# Altium PCB trap sensor LD PCB.PcbDoc
Units mil, origin at the board's own origin, x right, y up, seen from the top; angles counter-clockwise.
Board outline 3340 x 2720 mil, 2 copper layers (Top Layer, Bottom Layer); 19 components, 18 nets, 83 pads, 4 vias.
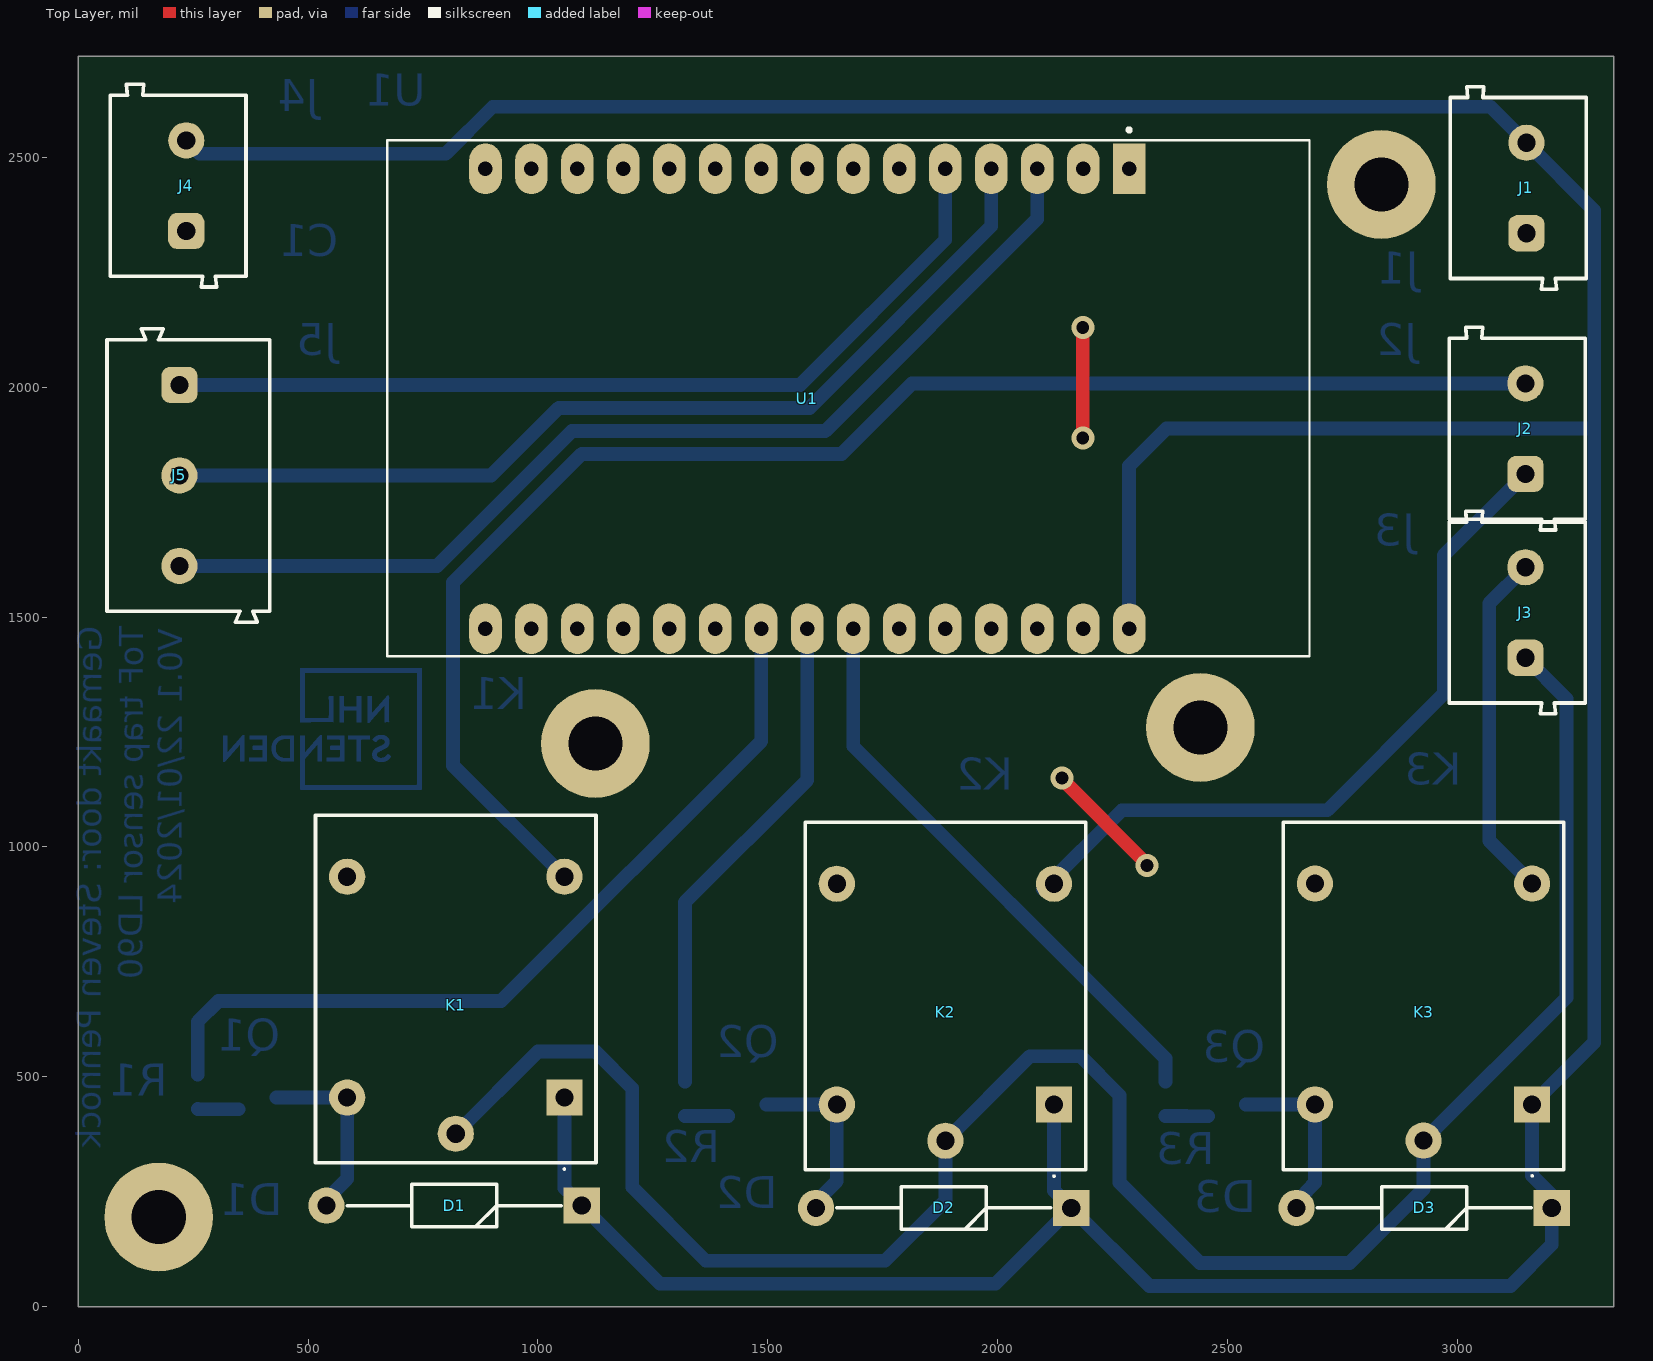
[diagram p0: Top Layer view]
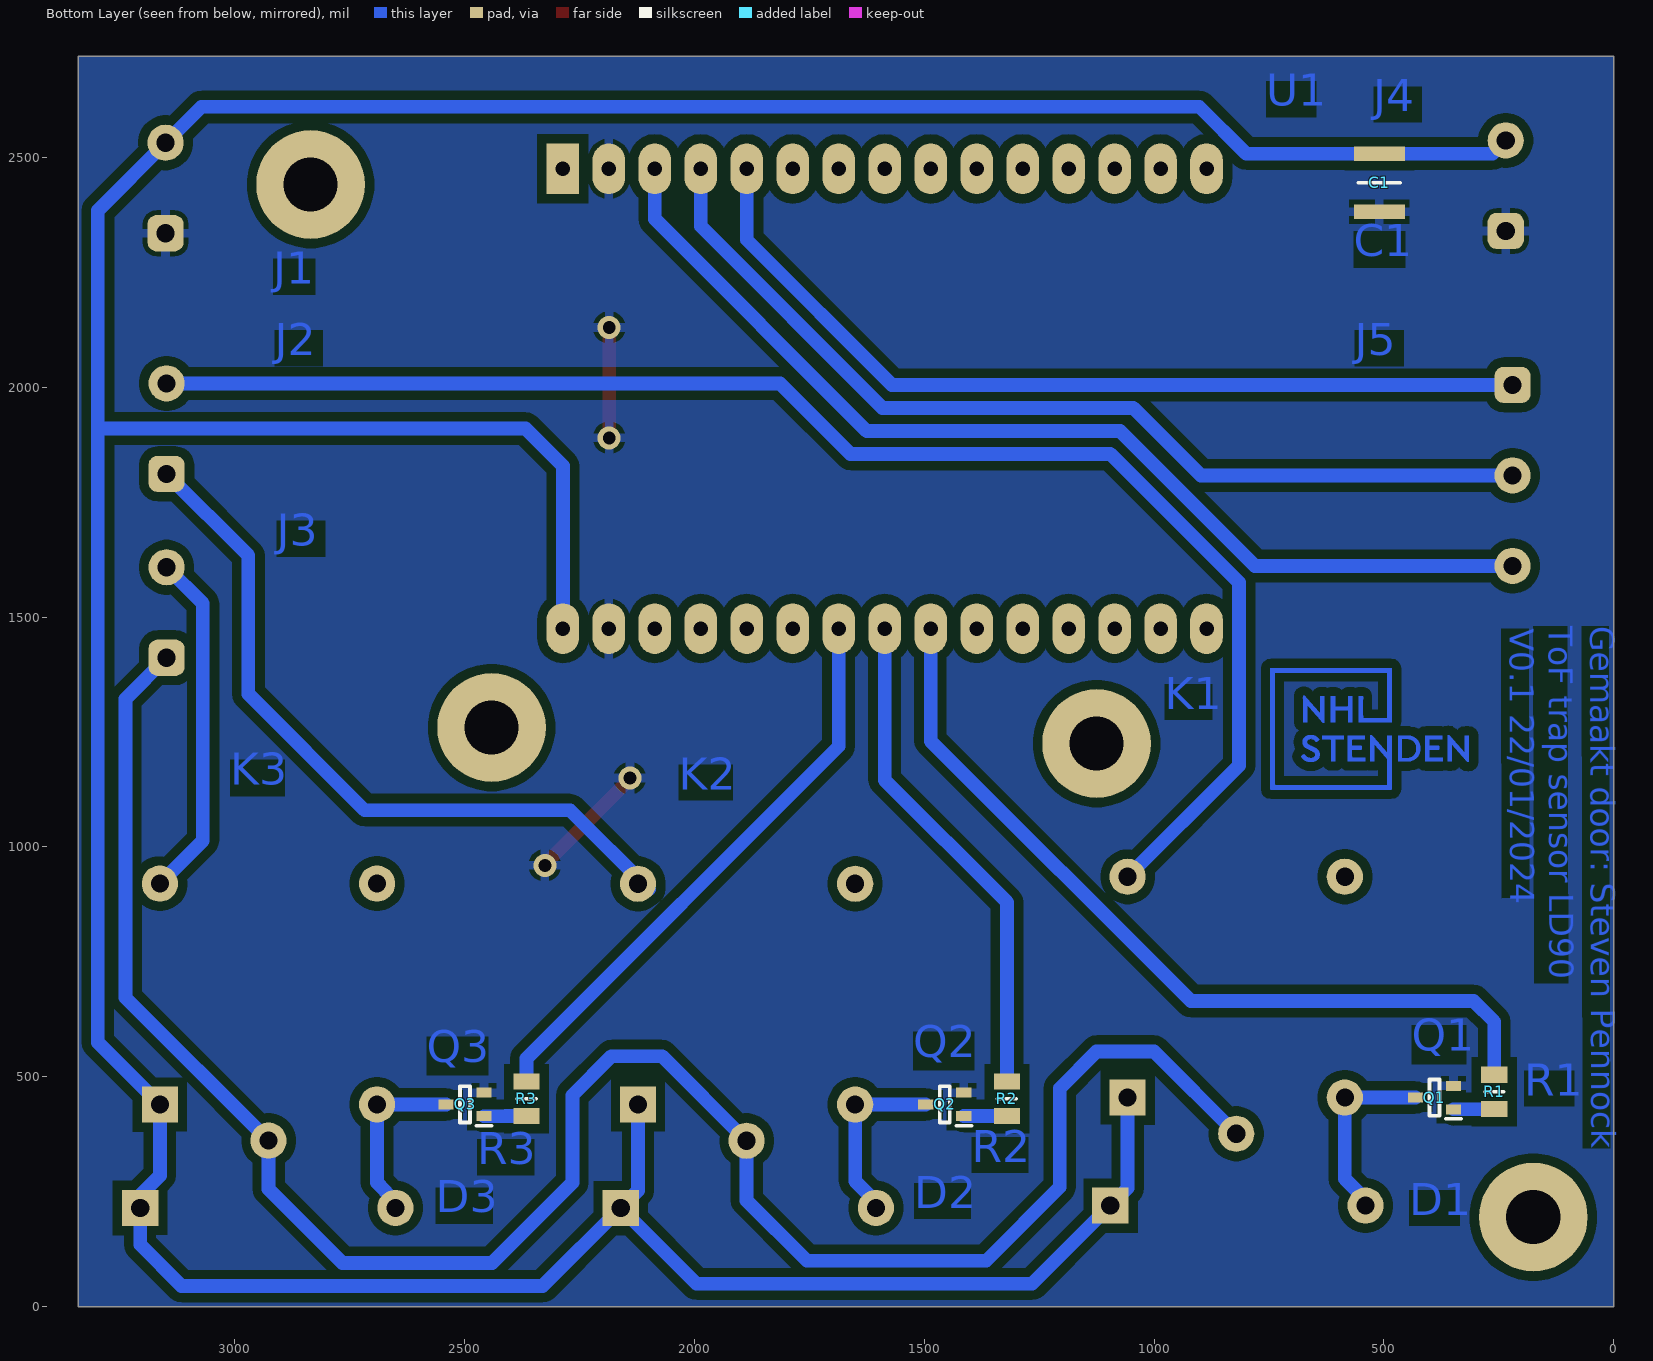
[diagram p1: Bottom Layer view, seen from below]
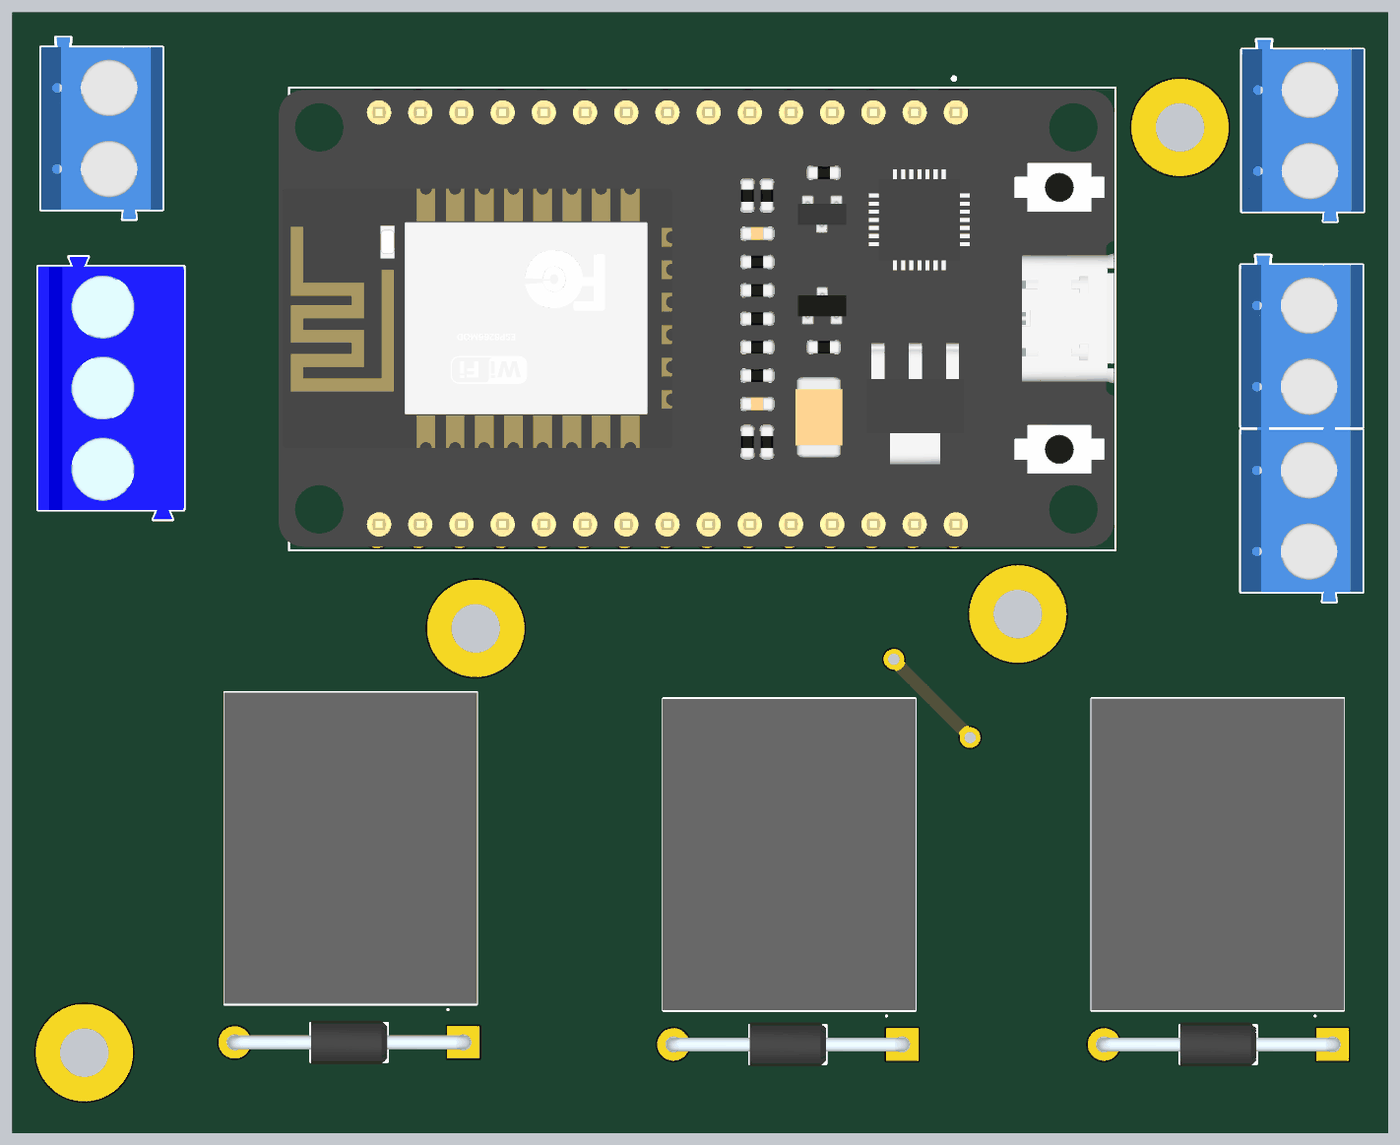
[diagram p2: 3D render of the assembled board from above, using the file's embedded part models]
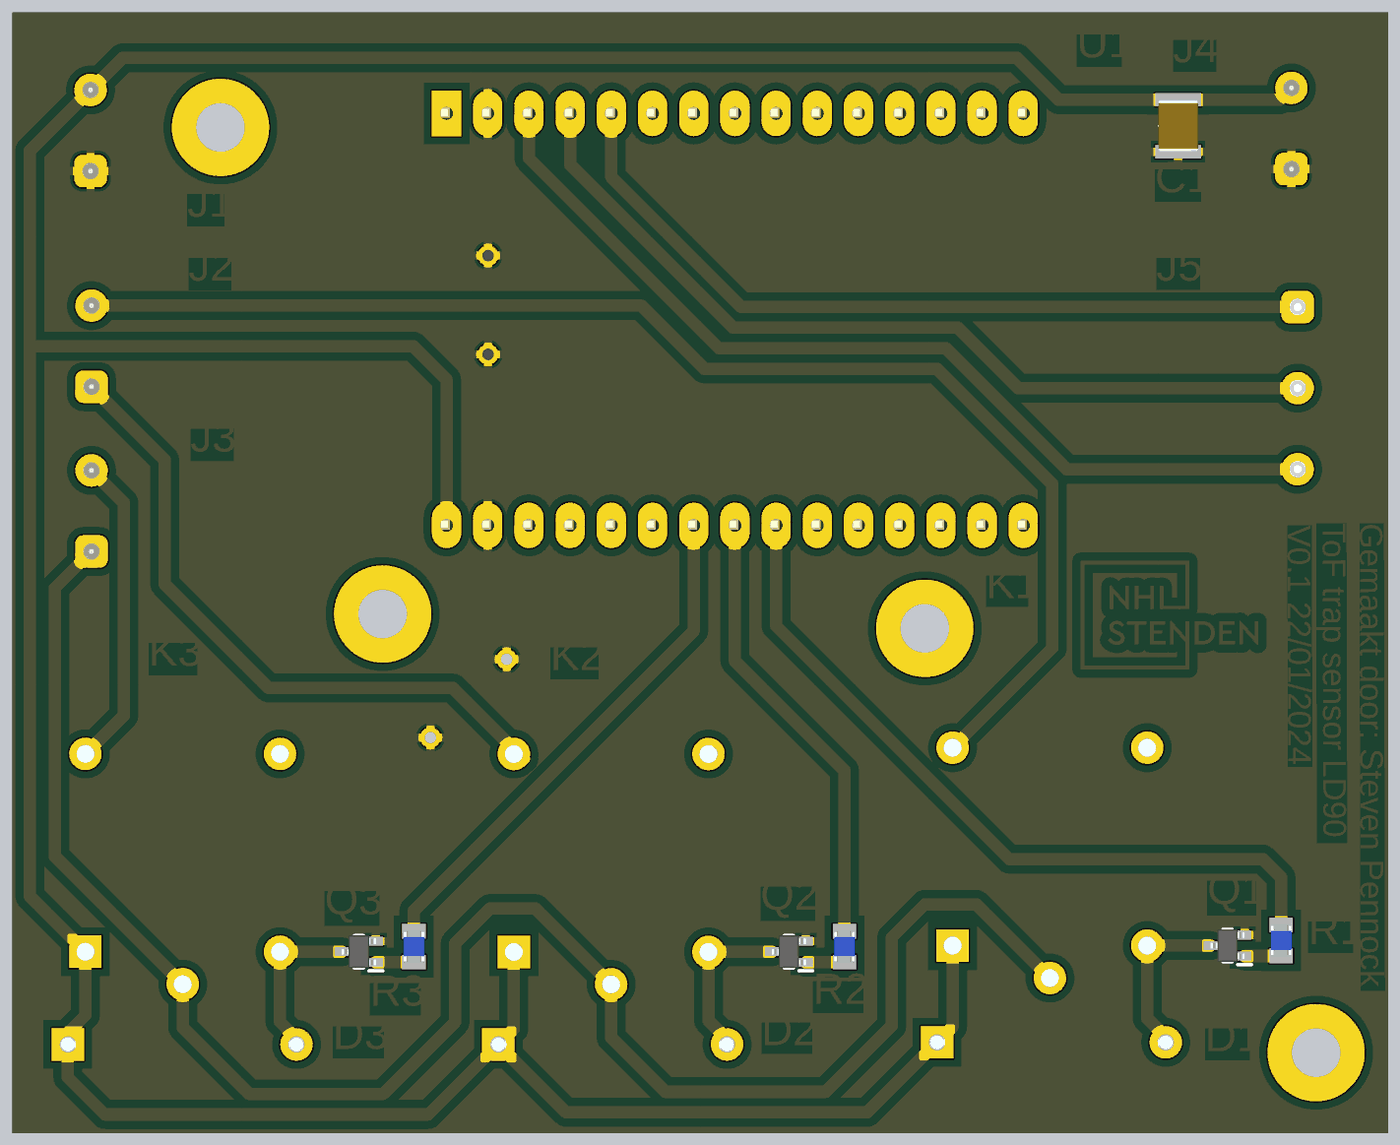
[diagram p3: 3D render of the assembled board from below, using the file's embedded part models]

## Layer stack, top to bottom
Top Solder: solder mask 0.4, Solder Resist, Dk 3.5
Top Layer: signal copper 1.4
Dielectric 1: dielectric 12.6, FR-4, Dk 4.8
Bottom Layer: signal copper 1.4
Bottom Solder: solder mask 0.4, Solder Resist, Dk 3.5

## Board outline
0,0 3340,0 3340,2720 0,2720

## Design rules (kind name [scope] priority, off if disabled: settings)
Clearance [All] p1: gap=20 ignorepadtopadclearanceinfootprint=TRUE except(0: Arc-Text Track-Text SMDPad-Text THPad-Text Via-Text Fill-Text Poly-Text Region-Text Text-Text Text-Hole)
PolygonConnect [All] p1: connectstyle=Relief reliefconductorwidth=20 reliefentries=4 polygonreliefangle="90 Angle" airgapwidth=10
RoutingVias [All] p1: holewidth=28 width=50 viastyle="Through Hole" minholewidth=28 minwidth=50 maxholewidth=28 maxwidth=50
SolderMaskExpansion [All] p1: expansion=4 istentingtop=FALSE
Width [All] p1: maxlimit=50 minlimit=20 preferedwidth=30
30 further rules are at their usual default settings.

## Components (designator, comment, footprint, x,y, rotation, side; value= is the part's Value field where it differs from the comment)
C1 "1uF" CAPC3225X125N 510,2445 r270 bottom
D1 "1N4001" "diode 2" 1095.12,220 r180 top
D2 "1N4001" "diode 2" 2160,215 r180 top
D3 "1N4001" "diode 2" 3205.12,215 r180 top
J1 "power" 691102710002 3132.28,2433.43 r90 top
J2 "" 691102710002 3130,1910 r90 top
J3 "2X2 terminal block" 691102710002 3130,1510 r90 top
J4 "WS_power" 691102710002 217.28,2438.43 r90 top
J5 "WS_data" 691101710003 239.69,1808.14 r270 top
K1 "SRD-05VDC-SL-C" SRD05VDCSLC 1057.44,455 r90 top
K2 "SRD-05VDC-SL-C" SRD05VDCSLC 2122.44,439.69 r90 top
K3 "SRD-05VDC-SL-C" SRD05VDCSLC 3162.44,440 r90 top
Q1 "BFT92W" SOT65P210X110-3N 390,455 r0 bottom
Q2 "BFT92W" SOT65P210X110-3N 1455,440 r0 bottom
Q3 "BFT92W" SOT65P210X110-3N 2498.66,440 r0 bottom
R1 "1K" "resistor smd" 260,467.4 r270 bottom
R2 "1K" "resistor smd" 1320,452.4 r270 bottom
R3 "1K" "resistor smd" 2365,452.4 r270 bottom
U1 "ESP32-DEVKIT-V1" MODULE_ESP32_DEVKIT_V1 1675,1975 r270 top

## Footprints (in the part's own frame and the unit in brackets; to place one, negate y for a bottom-side part, rotate by r counter-clockwise, add the part's x,y. Pads: shape width x height; smd on the part's side, far side on the other; paste and mask are expansions set on the pad)
691101710003 [mm] "5,00mm - modular - blue - Horizontal entry with pressure clamp - 12,6mm height - 03p"
  rrect50% 2x2 hole 1: 1(-5,-0.5)
  round 2 hole 1: 2(0,-0.5) 3(5,-0.5)
  silkscreen extent -8.1,-4.5 8.1,4.5, body extent -8.1,-4.5 8.1,4.5, height 12.65
691102710002 [mm] "5,00mm - modular - blue - Horizontal entry with pressure clamp - 9,9 mm height - 02p"
  rrect50% 2x2 hole 1: 1(-2.5,-0.45)
  round 2 hole 1: 2(2.5,-0.45)
  silkscreen extent -5.6,-3.75 5.6,3.75, body extent -5.6,-3.75 5.6,3.75, height 9.96
CAPC3225X125N [mm]
  rect 0.81x2.82 smd: 1(-1.6,0) 2(1.6,0)
  silkscreen extent 0,-1.15 0,1.15, body extent -1.6,-1.25 1.6,1.25, height 1.25
"diode 2" [mm]
  rect 2x2 hole 1: 1(0,0)
  round 2 hole 1: 2(14.1,0)
  silkscreen extent 1.14,-1.18 12.96,1.18, body extent -0.43,-1.35 14.53,1.35, height 2.69
MODULE_ESP32_DEVKIT_V1 [mm]
  rect 2.8x1.8 / inner oval 2.8x1.8 / far side rect 2.8x1.8 hole 0.8: 1(-12.7,15.515)
  oval 2.8x1.8 hole 0.8: 2(-12.7,12.975) 3(-12.7,10.435) 4(-12.7,7.895) 5(-12.7,5.355) 6(-12.7,2.815) 7(-12.7,0.275) 8(-12.7,-2.265) 9(-12.7,-4.805) 10(-12.7,-7.345) 11(-12.7,-9.885) 12(-12.7,-12.425) 13(-12.7,-14.965) 14(-12.7,-17.505) 15(-12.7,-20.045) 16(12.7,-20.045) 17(12.7,-17.505) 18(12.7,-14.965) 19(12.7,-12.425) 20(12.7,-9.885) 21(12.7,-7.345) 22(12.7,-4.805) 23(12.7,-2.265) 24(12.7,0.275) 25(12.7,2.815) 26(12.7,5.355) 27(12.7,7.895) 28(12.7,10.435) 29(12.7,12.975) 30(12.7,15.515)
  silkscreen extent -14.95,-25.47 14.23,25.47, body extent -14.14,-26.12 14.01,25.38, height 15.01
"resistor smd" [mm]
  rect 0.9x1.45 smd: 1(-0.95,0) 2(0.95,0)
  silkscreen extent 0,-0.53 0,0.53, body extent -1,-0.62 1,0.63, height 0.45
SOT65P210X110-3N [mm]
  rect 0.85x0.55 smd: 1(-1.05,0.65) 2(-1.05,-0.65) 3(1.05,0)
  silkscreen extent -1.47,-1 0.27,1.18, body extent -1.05,-1 1.05,1, height 1.1
SRD05VDCSLC [mm]
  rect 2x2 hole 1: 1(0,0)
  round 2 hole 1: 2(12.2,0) 3(12.2,12) 4(0,12) 5(-2,6)
  silkscreen extent -4,-1.75 15.6,13.75, body extent -3.6,-1.8 15.6,13.8, height 15.9

## Part data
C1: library part MAL214699103E3, "Capacitor Polarised", Manufacturer_Name=Vishay, Mouser Part Number=594-MAL214699103E3, Arrow Part Number=MAL214699103E3, Arrow Price/Stock=https://www.arrow.com/en/products/mal214699103e3/vishay, Datasheet Link=https://www.vishay.com/docs/28403/146cti.pdf, Height=10.5mm, Manufacturer_Part_Number=MAL214699103E3, Mouser Price/Stock=https://www.mouser.co.uk/ProductDetail/Vishay-BC-Components/MAL214699103E3?qs=Ep9Lwju7gVqGv9YdqsYr5A%3D%3D
D1 D2 D3: "Diode", Manufacturer_Name="Taiwan Semiconductor", Mouser Part Number=821-1N4001, Datasheet Link="http://www.taiwansemi.com/products/datasheet/1N4001 SERIES_H14.pdf", Manufacturer_Part_Number=1N4001, Mouser Price/Stock=https://www.mouser.co.uk/ProductDetail/Taiwan-Semiconductor/1N4001?qs=P0SCnEz%2FFstVLZNQCFODyw%3D%3D
J1 J2 J3 J4: library part CMP-1502-03258-2, Color=Blue, Current=15A, Max Operating Temperature=105°C, Min Operating Temperature=-40°C, Voltage=300V, Contact Material=Brass, Contact Plating=Tin, Current Rating=15A, Height=13.4mm, Housing Material=Nylon, Lead Pitch=5mm, Length=7.5mm, Mount="Through Hole", NexarPartId=8917706, Number of Contacts=2, Number of Levels=1, Number of Pins=2, Number of Positions Per Level=2, Packaging=Box, Pitch=5.0038mm, Plating=Steel, REACH SVHC=Unknown, RoHS=Compliant, Stripping Length=-6mm, Termination=Screw, Voltage Rating=300V, Width=11.2mm, Wire Gauge (Max)=22AWG, Wire Gauge (Min)=14AWG, Wire/Cable Gauge=22AWG
J5: library part CMP-1502-03257-2, Color=Blue, Current=16A, Max Operating Temperature=105°C, Min Operating Temperature=-40°C, Voltage=250V, Contact Material=Brass, Contact Plating=Tin, Current Rating=16A, Height=16.4mm, Housing Material=Nylon, Lead Pitch=5mm, Length=9mm, Mount="Through Hole", NexarPartId=8917705, Number of Contacts=3, Number of Levels=1, Number of Pins=3, Number of Positions Per Level=3, Packaging=Box, Pitch=5.0038mm, Plating=Steel, REACH SVHC=Unknown, RoHS=Compliant, Stripping Length=-7mm, Termination=Screw, Voltage Rating=250V, Width=16.2mm, Wire Gauge (Max)=26AWG, Wire Gauge (Min)=14AWG, Wire/Cable Gauge=26AWG
K1 K2 K3: "Relay or Contactor", Manufacturer_Name=EAGLE, Datasheet Link=http://www.songlerelay.com/Public/Uploads/20161104/581c81ac16e36.pdf, Height=15.8mm, Manufacturer_Part_Number=SRD-05VDC-SL-C
Q1 Q2 Q3: "Transistor BJT NPN", Manufacturer_Name=NXP, Mouser Part Number=N/A, Datasheet Link=http://uk.rs-online.com/web/p/products/3803228, Height=1.1mm, Manufacturer_Part_Number=BFT92W, Mouser Price/Stock=https://www.mouser.co.uk/ProductDetail/NXP-Semiconductors/BFT92W/?qs=fAHHVMwC%252BbirqGt1esWTqQ%3D%3D
R1 R2 R3: library part MCU0805MD1001DP500, "Resistor", Manufacturer_Name=Vishay, Mouser Part Number=594-MCU0805MD1001DP5, Arrow Part Number=MCU0805MD1001DP500, Arrow Price/Stock=https://www.arrow.com/en/products/mcu0805md1001dp500/vishay, Datasheet Link=http://www.vishay.com/docs/28760/mcat_pro.pdf, Height=0.62mm, Manufacturer_Part_Number=MCU0805MD1001DP500
U1: "Dual core, Wi-Fi: 2.4 GHz up to 150 Mbits/s,BLE (Bluetooth Low Energy) and legacy Bluetooth, 32 bits, Up to 240 MHz", Package=None, Availability="Not in stock", Check_prices=https://www.snapeda.com/parts/ESP32-DEVKIT-V1/Do+it/view-part/?ref=eda, MF="Do it", MP=ESP32-DEVKIT-V1, Price=None, SnapEDA_Link=https://www.snapeda.com/parts/ESP32-DEVKIT-V1/Do+it/view-part/?ref=snap

## Free pads (board coordinates)
  round 236.22 hole 118.11: 49(175,195) 50(2834.65,2440.94) 51(1125,1225) 52(2440.94,1259.84)

## Via types
v1: diameter 50, hole 28, Top Layer to Bottom Layer, 4 vias

## Nets (pads, with @x,y where several pads share a name; then routed paths per layer and width w, separated by ;. In a path a pad name is that pad's centre, name@x,y a point inside that pad or via, vN(x,y) a via of type N, cw(c..) or ccw(c..) an arc to the next point about the centre after c; other vN are vias at no path point)
+5: C1.1 D1.1 D2.1 D3.1 J1.2 J4.2 K1.1 K2.1 K3.1 U1.30 | length 9779.5
  Bottom Layer w30: J4.2 263.86,2507.99 C1.1 799.53,2507.99 901.53,2610 3071.85,2610 J1.2 3297.43,2384.42 3297.43,1910 ; K1.1 1057.44,257.68 D1.1 1265.12,50 1995,50 D2.1 ; K2.1 2122.44,252.56 D2.1 ; U1.30 2285.83,1829 2366.83,1910 3297.43,1910 ; D2.1 2330,45 3115.12,45 3205.12,135 3205.12,243 3162.44,285.68 K3.1 3297.43,574.99 3297.43,1910
E-STOP_SRC: J3.1 K1.5 K2.5 K3.5 | length 4439.3
  Bottom Layer w30: K1.5 999.96,555 1125,555 1205,475 1205,260 1365,100 1755,100 1886.22,231.22 K2.5 2070.28,545 2180,545 2265,460 2265,270 2440,95 2765,95 2926.22,256.22 K3.5 3237,672.04 3237,1322.29 J3.1
GND: C1.2 J1.1 J4.1 Q1.2 Q2.2 Q3.2 U1.2 U1.29 | length 506.6
  Top Layer w30: v1(2140,1150) 2140,1147.5 2325,962.5 v1(2325,960) ; v1(2185,1890) v1(2185,2130)
K1_sig: R1.1 U1.22 | length 1838.2
  Bottom Layer w30: R1.1 260,620 305,665 920,665 1485.83,1230.83 U1.22
K2_sig: R2.1 U1.23 | length 1095.3
  Bottom Layer w30: R2.1 1320,880 1585.83,1145.83 U1.23
K3_sig: R3.1 U1.24 | length 1266.5
  Bottom Layer w30: U1.24 1685.83,1219.17 2365,540 R3.1
NetD1_2: D1.2 K1.4 Q1.3 | length 407.3
  Bottom Layer w30: Q1.3 K1.4 585,278.19 540,233.19 D1.2
NetD2_2: D2.2 K2.4 Q2.3 | length 397.2
  Bottom Layer w30: Q2.3 1496.49,439.84 1649.84,439.84 K2.4 1650,273.31 1604.88,228.19 D2.2
NetD3_2: D3.2 K3.4 Q3.3 | length 393.7
  Bottom Layer w30: Q3.3 K3.4 2690,270 2672.16,252.16 2672.16,250.35 2644.88,223.07 D3.2@2644.88,215
NetQ1_1: Q1.1 R1.2 | length 88.9
  Bottom Layer w30: R1.2 260.3,429.7 348.37,429.7 Q1.1
NetQ2_1: Q2.1 R2.2 | length 93.9
  Bottom Layer w30: R2.2 1320.3,414.7 1413.37,414.7 Q2.1
NetQ3_1: Q3.1 R3.2 | length 92.6
  Bottom Layer w30: R3.2 2410,415 2410.59,414.41 Q3.1
USER_BUMPER_1: J2.2 K1.2 | length 3262.5
  Bottom Layer w30: K1.2@1064.82,927.93 815.39,1177.36 815.39,1575.39 1095,1855 1660,1855 1813.43,2008.43 J2.2
USER_BUMPER_2: J2.1 K2.2 | length 1599.9
  Bottom Layer w30: K2.2@2098.2,908.2 2270,1080 2717,1080 2970,1333 2970,1633.86 J2.1
USER_BUMPER_3: J3.2 K3.2 | length 759.4
  Bottom Layer w30: J3.2 3069,1529.71 3069,1013.76 K3.2
WS_1: J5.3 U1.3 | length 2287.5
  Bottom Layer w30: J5.3 780.59,1611.3 1074.29,1905 1625,1905 2085.83,2365.83 U1.3
WS_2: J5.2 U1.4 | length 2115.2
  Bottom Layer w30: J5.2 898.15,1808.15 1045,1955 1590.71,1955 1985.83,2350.12 U1.4
WS_3: J5.1 U1.5 | length 1950.8
  Bottom Layer w30: J5.1 1570,2005 1885.83,2320.83 U1.5
pads on no net: K1.3 K2.3 K3.3 U1.1 U1.6 U1.7 U1.8 U1.9 U1.10 U1.11 U1.12 U1.13 U1.14 U1.15 U1.16 U1.17 U1.18 U1.19 U1.20 U1.21 U1.25 U1.26 U1.27 U1.28

## Polygon pours and split planes (outlines as drawn)
GND on Bottom Layer "GND_L02_P000" (solid, pour order 0): 0,0 3340,0 3340,2720 0,2720

## Other copper
Bottom Layer:
  region: 615.24,1277.14 615.24,1271.77 615.08,1271.77 615.08,1271.61 614.45,1271.61 614.45,1271.45 613.82,1271.45 613.82,1271.61 613.34,1271.61 613.34,1271.45 612.71,1271.45 612.71,1271.61 612.39,1271.61 612.39,1271.45 612.08,1271.45 612.08,1271.61 611.6,1271.61 611.6,1271.45 611.13,1271.45 611.13,1271.61 610.5,1271.61 610.5,1271.45 610.02,1271.45 610.02,1271.61 609.23,1271.61 609.23,1271.45 608.6,1271.45 608.6,1271.61 608.13,1271.61 608.13,1271.45 607.34,1271.45 607.34,1271.61 606.55,1271.61 606.55,1271.77 606.23,1271.77 606.23,1271.93 606.07,1271.93 606.07,1296.89 605.92,1296.89 605.92,1297.2 605.6,1297.2 605.6,1297.36 578.27,1297.36 578.27,1297.2 577.95,1297.2 577.95,1296.89 577.79,1296.89 577.79,1272.09 577.64,1272.09 577.64,1271.77 577.48,1271.77 577.48,1271.61 577.32,1271.61 577.32,1271.45 575.42,1271.45 575.42,1271.61 574.95,1271.61 574.95,1271.45 574.79,1271.45 574.79,1271.61 572.74,1271.61 572.74,1271.45 570.84,1271.45 570.84,1271.61 570.21,1271.61 570.21,1271.45 569.58,1271.45 569.58,1271.61 569.11,1271.61 569.11,1271.77 568.95,1271.77 568.95,1271.93 568.79,1271.93 568.79,1272.4 568.63,1272.4 568.63,1272.56 568.79,1272.56 568.79,1273.19 568.63,1273.19 568.63,1327.22 568.79,1327.22 568.79,1327.7 569.11,1327.7 569.11,1327.85 569.26,1327.85 569.26,1328.01 577.16,1328.01 577.16,1327.85 577.48,1327.85 577.48,1327.7 577.64,1327.7 577.64,1327.38 577.79,1327.38 577.79,1325.8 577.64,1325.8 577.64,1325.48 577.79,1325.48 577.79,1305.74 577.95,1305.74 577.95,1305.58 578.27,1305.58 578.27,1305.42 605.76,1305.42 605.76,1305.58 605.92,1305.58 605.92,1305.89 606.07,1305.89 606.07,1327.38 606.23,1327.38 606.23,1327.7 606.55,1327.7 606.55,1327.85 606.86,1327.85 606.86,1328.01 614.76,1328.01 614.76,1327.85 615.08,1327.85 615.08,1327.7 615.24,1327.7 615.24,1277.3
  region: 540.35,1192.3 540.35,1193.41 540.51,1193.41 540.51,1193.88 540.67,1193.88 540.67,1194.04 568.47,1194.04 568.47,1194.2 569.11,1194.2 569.11,1194.36 569.26,1194.36 569.26,1194.99 569.42,1194.99 569.42,1195.62 569.26,1195.62 569.26,1195.94 569.42,1195.94 569.42,1211.1 569.26,1211.1 569.26,1211.42 569.11,1211.42 569.11,1211.58 568.95,1211.58 568.95,1211.73 568.63,1211.73 568.63,1211.89 548.72,1211.89 548.72,1212.05 548.57,1212.05 548.57,1212.37 548.41,1212.37 548.41,1219.32 548.57,1219.32 548.57,1219.63 548.88,1219.63 548.88,1219.79 568.79,1219.79 568.79,1219.95 569.11,1219.95 569.11,1220.11 569.26,1220.11 569.26,1220.27 569.42,1220.27 569.42,1233.22 569.26,1233.22 569.26,1233.85 569.11,1233.85 569.11,1234.01 568.79,1234.01 568.79,1234.17 542.09,1234.17 542.09,1234.33 541.62,1234.33 541.62,1234.48 541.46,1234.48 541.46,1241.91 541.62,1241.91 541.62,1242.07 541.77,1242.07 541.77,1242.23 542.41,1242.23 542.41,1242.38 543.2,1242.38 543.2,1242.23 543.67,1242.23 543.67,1242.38 544.62,1242.38 544.62,1242.23 544.78,1242.23 544.78,1242.38 575.9,1242.38 575.9,1242.23 576.37,1242.23 576.37,1242.38 577.79,1242.38 577.79,1242.23 578.11,1242.23 578.11,1242.07 578.27,1242.07 578.27,1241.75 578.43,1241.75 578.43,1186.46 578.27,1186.46 578.27,1186.14 577.95,1186.14 577.95,1185.98 540.98,1185.98 540.98,1186.14 540.67,1186.14 540.67,1186.3 540.51,1186.3 540.51,1186.61 540.35,1186.61 540.35,1192.14
  region: 593.28,1242.38 633.09,1242.38 633.09,1242.23 633.56,1242.23 633.56,1242.07 633.88,1242.07 633.88,1241.59 634.04,1241.59 634.04,1234.96 633.88,1234.96 633.88,1234.48 633.72,1234.48 633.72,1234.33 633.41,1234.33 633.41,1234.17 615.24,1234.17 615.24,1234.01 615.08,1234.01 615.08,1233.22 614.92,1233.22 614.92,1186.93 615.08,1186.93 615.08,1186.61 614.92,1186.61 614.92,1186.14 614.76,1186.14 614.76,1185.98 606.55,1185.98 606.55,1186.14 606.07,1186.14 606.07,1186.3 605.92,1186.3 605.92,1233.85 605.76,1233.85 605.76,1234.01 605.6,1234.01 605.6,1234.17 587.43,1234.17 587.43,1234.33 587.12,1234.33 587.12,1234.64 586.96,1234.64 586.96,1241.91 587.12,1241.91 587.12,1242.07 587.27,1242.07 587.27,1242.23 587.75,1242.23 587.75,1242.38 593.12,1242.38
  region: 875 vertices and 0 holes, not listed, extent 629.46,1270.51 676.06,1328.96
  region: 845 vertices and 0 holes, not listed, extent 315.06,1185.03 361.51,1243.33
  region: 380.31,1185.98 372.41,1185.98 372.41,1186.14 372.25,1186.14 372.25,1186.3 372.1,1186.3 372.1,1186.61 371.94,1186.61 371.94,1193.41 372.1,1193.41 372.1,1193.88 372.25,1193.88 372.25,1194.04 400.06,1194.04 400.06,1194.2 400.85,1194.2 400.85,1194.36 401.01,1194.36 401.01,1194.99 401.17,1194.99 401.17,1209.36 401.01,1209.36 401.01,1210.15 401.17,1210.15 401.17,1211.1 401.01,1211.1 401.01,1211.58 400.85,1211.58 400.85,1211.73 400.22,1211.73 400.22,1211.89 380.31,1211.89 380.31,1212.21 380.15,1212.21 380.15,1212.68 380,1212.68 380,1219.16 380.15,1219.16 380.15,1219.48 380.31,1219.48 380.31,1219.63 380.47,1219.63 380.47,1219.79 400.53,1219.79 400.53,1219.95 401.01,1219.95 401.01,1220.42 401.17,1220.42 401.17,1232.9 401.01,1232.9 401.01,1234.01 400.69,1234.01 400.69,1234.17 373.36,1234.17 373.36,1234.33 373.2,1234.33 373.2,1234.48 373.04,1234.48 373.04,1234.96 372.89,1234.96 372.89,1241.28 373.04,1241.28 373.04,1241.91 373.2,1241.91 373.2,1242.07 373.36,1242.07 373.36,1242.23 373.83,1242.23 373.83,1242.38 409.22,1242.38 409.22,1242.23 409.7,1242.23 409.7,1242.07 409.86,1242.07 409.86,1241.91 410.01,1241.91 410.01,1241.59 410.17,1241.59 410.17,1186.46 410.01,1186.46 410.01,1186.3 409.86,1186.3 409.86,1186.14 409.54,1186.14 409.54,1185.98 380.47,1185.98
  region: 897 vertices and 0 holes, not listed, extent 483.16,1125 746.68,1388.99
  region: 426 vertices and 1 holes, not listed, extent 420.76,1185.98 469.26,1242.38
  region: 1333 vertices and 0 holes, not listed, extent 639.88,1185.03 679.7,1243.33
  text "Gemaakt door: Steven Pennock" at 69.04,1480 h90 r89.86
  text "ToF trap sensor LD90" at 159.03,1480.04 h90 r89.86
  text "V0.1 22/01/2024" at 244,1474.96 h90 r89.86